# EAGLE board Child-panelized (EAGLE 7.4.0)
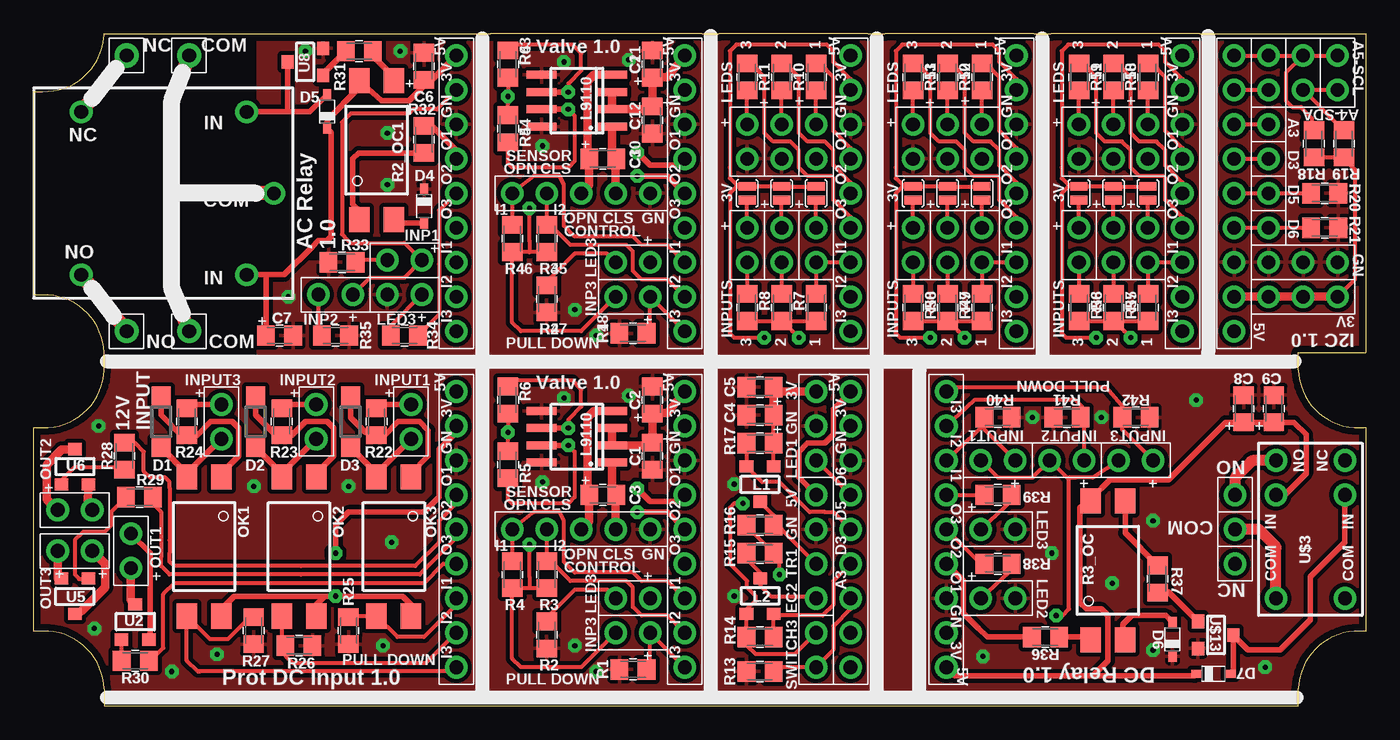
[diagram p0: board, top side]
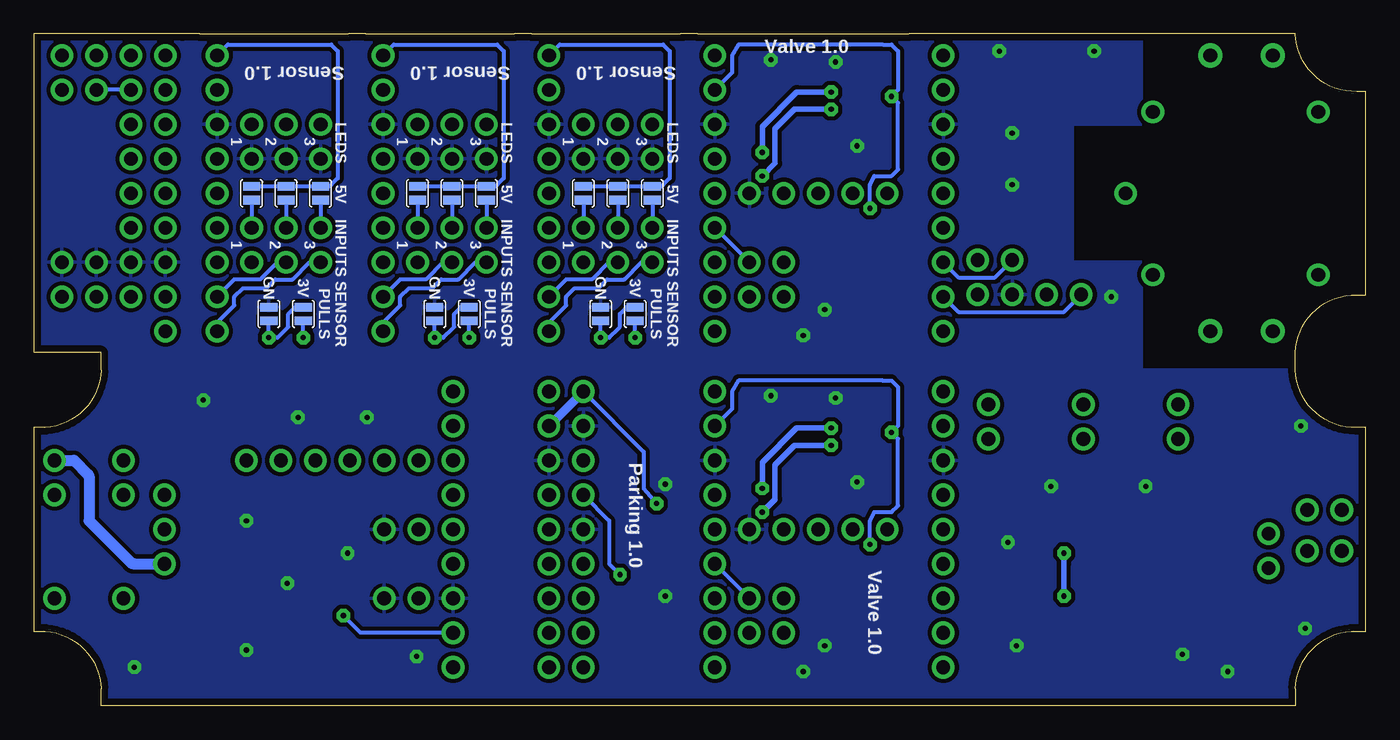
[diagram p1: board, bottom side, seen from below]

Size 98.11 x 49.53 mm. Coordinates in mm from the lower left corner, seen from the top.
Outline: 5.17,1.27 arc90 0.67,5.52 0,5.52 0,20.52 0.67,20.52 arc90 5.17,24.77 5.17,26.04 arc90 0.67,30.28 0,30.28 0,45.29 0.67,45.29 arc90 5.17,49.53 32.38,49.53 33.66,49.53 49.21,49.53 50.32,49.53 50.48,49.53 61.44,49.53 62.71,49.53 73.66,49.53 74.93,49.53 85.88,49.53 87.15,49.53 98.11,49.53 98.11,26.04 93.17,26.04 93.17,24.77 arc90 97.67,20.52 98.11,20.52 98.11,5.51 97.67,5.51 arc90 93.17,1.27 93.17,0 5.17,0 5.17,1.27
Copper layers (1*2*15*16): Top 0.035mm / dielectric 0.2mm / layer 2 0.035mm / dielectric 1.2mm / layer 15 0.035mm / dielectric 0.2mm / Bottom 0.035mm
Design rules "Elecrow_PCB_eagle_rule": minimum track width 6mil, minimum drill 12mil, track to track 6mil, track to pad 8mil, pad to pad 12mil, via to via 6mil, smd to smd 0mil, copper to edge 20mil, drill to drill 10mil, minimum pad ring 6mil, minimum via ring 6mil, stop-mask expansion 0mil, vias tented up to drill 100mil, thermal gap 10mil
tKeepout: area 15.2,35.2 to 20.3,40.3

## Footprints (pad centres in the part's own frame; a part is rotated, then mirrored left to right if it is on the bottom)
CAP_0805 = smd 1.3 x 1.5: 1 -1,0; 2 1,0
SOD123 = smd 1.4 x 1.4: A 1.9,0; C -1.9,0
SOD323 = smd 0.8 x 0.6: A 1.25,0; C -1.25,0
SOT23-3 = smd 1 x 0.9: 1 -1,-1.3; 2 1,-1.3; 3 0,1.3
SO-08 = smd 0.6 x 2.2: 1 -1.905,-2.6; 2 -0.635,-2.6; 3 0.635,-2.6; 4 1.905,-2.6; 5 1.905,2.6; 6 0.635,2.6; 7 -0.635,2.6; 8 -1.905,2.6
SO-4_PC817 = smd 1.85 x 1.5: 1 -5.125,1.27; 2 -5.125,-1.27; 3 5.125,-1.27; 4 5.125,1.27
DUPONT_2 = drill 1.016 pad 1.676: 1 -1.27,0; 2 1.27,0
DUPONT_4 = drill 1.016 pad 1.676: 1 -3.81,0; 2 -1.27,0; 3 1.27,0; 4 3.81,0
DUPONT_3 = drill 1.016 pad 1.676: 1 -2.54,0; 2 0,0; 3 2.54,0
R_0805 = smd 1.3 x 1.5: 1 -1,0; 2 1,0
RELAY_SRD-SL-C = drill 1.016 pad 1.676: 1 -6.15,6; 2 -6.15,-6; 3 -8.15,0; 4 6.05,6; 5 6.05,-6
PAD-JUMPER-2-NO_YES_SILK = smd 0.635 x 1.27: 1 -0.501,0; 2 0.501,0
DUPONT_FEM90_9 = drill 1.016 pad 1.676: 1 -10.16,0; 2 -7.62,0; 3 -5.08,0; 4 -2.54,0; 5 0,0; 6 2.54,0; 7 5.08,0; 8 7.62,0; 9 10.16,0
RELAY-G5V = drill 1.016 pad 1.676: 1 5.08,2.54; 2 2.54,2.54; 5 -5.08,2.54; 6 -5.08,-2.54; 9 2.54,-2.54; 10 5.08,-2.54
DUPONT_9 = drill 1.016 pad 1.676: 1 -10.16,0; 2 -7.62,0; 3 -5.08,0; 4 -2.54,0; 5 0,0; 6 2.54,0; 7 5.08,0; 8 7.62,0; 9 10.16,0
DUPONT_1_LRG = drill 1.016 pad 1.778: 1 0,0
DUPONT_1 = drill 1.016 pad 1.676: 1 0,0
DUPONT_5 = drill 1.016 pad 1.676: 1 -5.08,0; 2 -2.54,0; 3 0,0; 4 2.54,0; 5 5.08,0

## Placement (x,y rotation side)
C1  0.1uF  [CAP_0805]  45.56,18.41 270 top
C2  10uF  [CAP_0805]  45.56,22.54 90 top
C3  0.1uF  [CAP_0805]  41.91,15.56 0 top
C4  10uF  [CAP_0805]  53.5,21.43 180 top
C5  0.1uF  [CAP_0805]  53.5,23.5 180 top
C6  10uF  [CAP_0805]  28.73,47.15 90 top
C7  0.1uF  [CAP_0805]  18.1,27.3 0 top
C8  10uF  [CAP_0805]  89.12,21.91 90 top
C9  0.1uF  [CAP_0805]  91.35,21.91 90 top
C10  0.1uF  [CAP_0805]  41.91,40.32 0 top
C11  10uF  [CAP_0805]  45.56,47.31 90 top
C12  0.1uF  [CAP_0805]  45.56,43.18 270 top
D1  1N4148  [SOD123]  9.37,20.95 270 top
D2  1N4148  [SOD123]  16.35,20.95 270 top
D3  1N4148  [SOD123]  23.34,20.95 270 top
D4  [SOD323]  28.73,36.83 270 top
D5  [SOD323]  21.59,43.81 90 top
D6  [SOD323]  83.89,4.92 90 top
D7  [SOD323]  86.9,2.38 0 top
L1  [SOT23-3]  53.5,16.35 180 top
L2  [SOT23-3]  53.5,8.1 0 top
L3  L9110 Motor 1  [SO-08]  40.01,44.61 90 top
L9110  L9110 Motor 1  [SO-08]  40.01,19.84 90 top
OK1  [SO-4_PC817]  12.54,11.75 270 top
OK2  [SO-4_PC817]  19.53,11.75 270 top
OK3  [SO-4_PC817]  26.51,11.75 270 top
PINP1  [DUPONT_2]  13.81,20.95 90 top
PINP2  [DUPONT_2]  20.8,20.95 90 top
PINP3  [DUPONT_2]  27.78,20.95 90 top
PRK_DIST  [DUPONT_4]  57.63,11.75 270 top
PRK_LED  [DUPONT_3]  57.63,20.64 270 top
PSWITCH  [DUPONT_2]  57.63,4.13 90 top
R1  10K  [R_0805]  44.13,2.7 180 top
R2  1K  [R_0805]  37.78,5.24 270 top
R2_LED  [DUPONT_2]  27.3,30.32 180 top
R2_OC1  [SO-4_PC817]  25.24,40.96 90 top
R2_RELAY  RELAY_SRD_SL_C  [RELAY_SRD-SL-C]  9.53,37.78 180 top
R2_SW  [DUPONT_2]  22.23,30.32 0 top
R2_SW1  [DUPONT_2]  27.3,32.86 0 top
R3  10K  [R_0805]  37.78,9.68 90 top
R3_LED  [DUPONT_2]  71.03,7.94 0 top
R3_LED1  [DUPONT_2]  71.03,13.02 0 top
R3_OC  [SO-4_PC817]  79.12,10 90 top
R4  10K  [R_0805]  35.24,9.68 90 top
R5  10K  [R_0805]  34.92,17.78 270 top
R6  10K  [R_0805]  34.92,22.54 90 top
R7  10K  [R_0805]  57.63,29.37 270 top
R8  10K  [R_0805]  55.09,29.37 270 top
R9  10K  [R_0805]  52.55,29.37 270 top
R10  1K  [R_0805]  57.63,46.35 270 top
R11  1K  [R_0805]  55.09,46.35 270 top
R12  1K  [R_0805]  52.55,46.35 270 top
R13  10K  [R_0805]  53.5,2.54 180 top
R14  10K  [R_0805]  53.5,5.08 180 top
R15  10K  [R_0805]  53.5,11.27 0 top
R16  10K  [R_0805]  53.5,13.34 180 top
R17  10K  [R_0805]  53.5,19.37 0 top
R18  4K7  [R_0805]  94.3,41.43 90 top
R19  4K7  [R_0805]  96.52,41.43 90 top
R20  10K  [R_0805]  95.09,37.78 0 top
R21  10K  [R_0805]  95.09,35.24 0 top
R22  4.7K  [R_0805]  25.24,20.95 90 top
R23  4.7K  [R_0805]  18.26,20.95 90 top
R24  4.7K  [R_0805]  11.27,20.95 90 top
R25  10K  [R_0805]  23.18,5.56 90 top
R26  10K  [R_0805]  19.53,4.45 180 top
R27  10K  [R_0805]  16.19,5.56 90 top
R28  1K  [R_0805]  6.67,18.41 270 top
R29  1K  [R_0805]  7.78,15.4 180 top
R30  1K  [R_0805]  7.46,3.33 180 top
R31  1K  [R_0805]  23.97,48.26 180 top
R32  1K  [R_0805]  28.73,41.75 90 top
R33  10K  [R_0805]  22.7,32.7 180 top
R34  1K  [R_0805]  27.3,27.3 0 top
R35  10K  [R_0805]  22.23,27.3 0 top
R36  1K  [R_0805]  74.52,5.08 180 top
R37  1K  [R_0805]  82.78,9.37 270 top
R38  1K  [R_0805]  71.03,10.48 180 top
R39  1K  [R_0805]  71.03,15.56 180 top
R40  10K  [R_0805]  71.03,21.27 0 top
R41  10K  [R_0805]  76.11,21.27 180 top
R42  10K  [R_0805]  81.19,21.27 0 top
R43  10K  [R_0805]  34.92,47.31 90 top
R44  10K  [R_0805]  34.92,42.55 270 top
R45  10K  [R_0805]  37.78,34.45 90 top
R46  10K  [R_0805]  35.24,34.45 90 top
R47  1K  [R_0805]  37.78,30 270 top
R48  10K  [R_0805]  44.13,27.46 180 top
R49  10K  [R_0805]  69.85,29.37 270 top
R50  10K  [R_0805]  67.31,29.37 270 top
R51  10K  [R_0805]  64.77,29.37 270 top
R52  1K  [R_0805]  69.85,46.35 270 top
R53  1K  [R_0805]  67.31,46.35 270 top
R54  1K  [R_0805]  64.77,46.35 270 top
R55  10K  [R_0805]  82.07,29.37 270 top
R56  10K  [R_0805]  79.53,29.37 270 top
R57  10K  [R_0805]  76.99,29.37 270 top
R58  1K  [R_0805]  82.07,46.35 270 top
R59  1K  [R_0805]  79.53,46.35 270 top
R60  1K  [R_0805]  76.99,46.35 270 top
RELAY4  [DUPONT_2]  7.14,11.43 90 top
RELAY5  [DUPONT_2]  3.02,11.43 180 top
RELAY6  [DUPONT_2]  3.02,14.45 0 top
RINP4  [DUPONT_2]  71.03,18.1 180 top
RINP5  [DUPONT_2]  76.11,18.1 180 top
RINP6  [DUPONT_2]  81.19,18.1 180 top
SENLED1  [DUPONT_2]  57.63,41.59 270 top
SENLED2  [DUPONT_2]  55.09,41.59 270 top
SENLED3  [DUPONT_2]  52.55,41.59 270 top
SENLED4  [DUPONT_2]  69.85,41.59 270 top
SENLED5  [DUPONT_2]  67.31,41.59 270 top
SENLED6  [DUPONT_2]  64.77,41.59 270 top
SENLED7  [DUPONT_2]  82.07,41.59 270 top
SENLED8  [DUPONT_2]  79.53,41.59 270 top
SENLED9  [DUPONT_2]  76.99,41.59 270 top
SENSOR1  [DUPONT_2]  57.63,33.97 90 top
SENSOR2  [DUPONT_2]  55.09,33.97 90 top
SENSOR3  [DUPONT_2]  52.55,33.97 90 top
SENSOR4  [DUPONT_2]  96.04,46.67 90 top
SENSOR5  [DUPONT_2]  44.13,5.4 180 top
SENSOR6  [DUPONT_2]  44.13,30.16 180 top
SENSOR7  [DUPONT_2]  90.96,46.67 90 top
SENSOR8  [DUPONT_2]  93.5,46.67 90 top
SENSOR9  [DUPONT_2]  69.85,33.97 90 top
SENSOR10  [DUPONT_2]  67.31,33.97 90 top
SENSOR11  [DUPONT_2]  64.77,33.97 90 top
SENSOR12  [DUPONT_2]  82.07,33.97 90 top
SENSOR13  [DUPONT_2]  79.53,33.97 90 top
SENSOR14  [DUPONT_2]  76.99,33.97 90 top
SJ1  [PAD-JUMPER-2-NO_YES_SILK]  57.63,37.78 90 top
SJ2  [PAD-JUMPER-2-NO_YES_SILK]  57.63,37.78 90 bottom
SJ3  [PAD-JUMPER-2-NO_YES_SILK]  55.09,37.78 90 top
SJ4  [PAD-JUMPER-2-NO_YES_SILK]  55.09,37.78 90 bottom
SJ5  [PAD-JUMPER-2-NO_YES_SILK]  52.55,37.78 90 top
SJ6  [PAD-JUMPER-2-NO_YES_SILK]  52.55,37.78 90 bottom
SJ7  [PAD-JUMPER-2-NO_YES_SILK]  53.82,28.89 270 bottom
SJ8  [PAD-JUMPER-2-NO_YES_SILK]  56.36,28.89 90 bottom
SJ9  [PAD-JUMPER-2-NO_YES_SILK]  69.85,37.78 90 top
SJ10  [PAD-JUMPER-2-NO_YES_SILK]  69.85,37.78 90 bottom
SJ11  [PAD-JUMPER-2-NO_YES_SILK]  67.31,37.78 90 top
SJ12  [PAD-JUMPER-2-NO_YES_SILK]  67.31,37.78 90 bottom
SJ13  [PAD-JUMPER-2-NO_YES_SILK]  64.77,37.78 90 top
SJ14  [PAD-JUMPER-2-NO_YES_SILK]  64.77,37.78 90 bottom
SJ15  [PAD-JUMPER-2-NO_YES_SILK]  66.04,28.89 270 bottom
SJ16  [PAD-JUMPER-2-NO_YES_SILK]  68.58,28.89 90 bottom
SJ17  [PAD-JUMPER-2-NO_YES_SILK]  82.07,37.78 90 top
SJ18  [PAD-JUMPER-2-NO_YES_SILK]  82.07,37.78 90 bottom
SJ19  [PAD-JUMPER-2-NO_YES_SILK]  79.53,37.78 90 top
SJ20  [PAD-JUMPER-2-NO_YES_SILK]  79.53,37.78 90 bottom
SJ21  [PAD-JUMPER-2-NO_YES_SILK]  76.99,37.78 90 top
SJ22  [PAD-JUMPER-2-NO_YES_SILK]  76.99,37.78 90 bottom
SJ23  [PAD-JUMPER-2-NO_YES_SILK]  78.26,28.89 270 bottom
SJ24  [PAD-JUMPER-2-NO_YES_SILK]  80.8,28.89 90 bottom
U2  [SOT23-3]  7.46,6.19 0 top
U5  [SOT23-3]  3.02,8.1 180 top
U6  [SOT23-3]  3.02,17.62 0 top
U$1  [DUPONT_FEM90_9]  31.11,13.02 90 top
U$2  [DUPONT_FEM90_9]  47.94,13.02 90 top
U$3  RELAY_G5V1  [RELAY-G5V]  94.05,13.02 90 top
U$4  [DUPONT_9]  60.17,13.02 90 top
U$5  [DUPONT_FEM90_9]  47.94,37.78 90 top
U$6  [DUPONT_FEM90_9]  60.17,37.78 90 top
U$7  [DUPONT_FEM90_9]  31.11,37.78 90 top
U$8  [SOT23-3]  20,47.47 90 top
U$9  [DUPONT_1_LRG]  6.83,27.62 270 top
U$10  [DUPONT_1_LRG]  11.43,27.62 270 top
U$11  [DUPONT_1_LRG]  6.83,47.94 270 top
U$12  [DUPONT_1_LRG]  11.43,47.94 270 top
U$13  [SOT23-3]  87.06,5.24 270 top
U$14  [DUPONT_FEM90_9]  67.22,13.02 270 top
U$15  [DUPONT_1]  88.49,10.48 90 top
U$16  [DUPONT_1]  88.49,13.02 90 top
U$17  [DUPONT_1]  88.49,15.56 90 top
U$18  [DUPONT_FEM90_9]  88.42,37.78 270 top
U$19  [DUPONT_1]  90.96,42.86 270 top
U$20  [DUPONT_1]  90.96,35.24 270 top
U$21  [DUPONT_1]  90.96,37.78 270 top
U$22  [DUPONT_1]  90.96,40.32 270 top
U$23  [DUPONT_3]  93.5,32.7 0 top
U$24  [DUPONT_3]  93.5,30.16 0 top
U$25  [DUPONT_FEM90_9]  72.39,37.78 90 top
U$26  [DUPONT_FEM90_9]  84.61,37.78 90 top
VALVE  [DUPONT_5]  40.32,13.02 180 top
VALVE1  [DUPONT_5]  40.32,37.78 180 top
VLV_LED  [DUPONT_2]  44.13,7.94 180 top
VLV_LED1  [DUPONT_2]  44.13,32.7 180 top

## Library data of the parts
C1-C12 D4-D7 L1-L3 L9110 OK1-OK3 PINP1-PINP3 PRK_DIST PRK_LED PSWITCH R1 R2 R2_LED R2_OC1 R2_RELAY R2_SW R2_SW1 R3 R3_LED R3_LED1 R3_OC R4-R60 RELAY4-RELAY6 RINP4-RINP6 SENLED1-SENLED9 SENSOR1-SENSOR14 SJ1-SJ24 U2 U5 U6 U$1-U$26 VALVE VALVE1 VLV_LED VLV_LED1 = TD22057
D1-D3 = diodes; MPN: 1N4148W; OC_FARNELL: 1651821; PACKAGE: SOD123; SUPPLIER: MULTICOMP

## Nets
I2C_+3V3: R18.1 R19.1 U$18.8 U$24.1 U$24.2 U$24.3
I2C_A3: U$18.3 U$19.1
I2C_D3: U$18.4 U$22.1
I2C_D5: R20.1 U$18.5 U$21.1
I2C_D6: R21.1 U$18.6 U$20.1
I2C_GND: R20.2 R21.2 U$18.7 U$23.1 U$23.2 U$23.3
I2C_SCL: R18.2 SENSOR4.2 SENSOR7.2 SENSOR8.2 U$18.1
I2C_SDA: R19.2 SENSOR4.1 SENSOR7.1 SENSOR8.1 U$18.2
N$1: C10.1 L3.4 VALVE1.3
N$2: C10.2 L3.1 VALVE1.2
N$3: C3.1 L9110.4 VALVE.3
N$4: C3.2 L9110.1 VALVE.2
N$5: R2.1 VLV_LED.2
N$6: D1.C OK1.1 R24.1
N$7: D1.A OK1.2 PINP1.1
N$8: PINP1.2 R24.2
N$9: D2.C OK2.1 R23.1
N$10: D2.A OK2.2 PINP2.1
N$11: PINP2.2 R23.2
N$12: R47.1 VLV_LED1.2
N$13: D3.C OK3.1 R22.1
N$14: D3.A OK3.2 PINP3.1
N$15: PINP3.2 R22.2
N$16: R10.2 SENLED1.1
N$17: R11.2 SENLED2.1
N$18: R12.2 SENLED3.1
N$19: R30.2 U2.1
N$20: R52.2 SENLED4.1
N$21: RELAY4.1 U2.3
N$22: RELAY4.2 U2.2
N$23: R53.2 SENLED5.1
N$24: R54.2 SENLED6.1
N$25: SENSOR11.2 SJ13.1 SJ14.1
N$26: SENSOR3.2 SJ5.1 SJ6.1
N$27: SENSOR2.2 SJ3.1 SJ4.1
N$28: R29.2 U5.1
N$29: R28.2 U6.1
N$30: R3_LED1.1 R39.1
N$31: RELAY5.1 U5.3
N$32: RELAY5.2 U5.2
N$33: RELAY6.1 U6.3
N$34: RELAY6.2 U6.2
N$35: R2_LED.1 R34.1
N$36: D5.A R2_RELAY.2 U$8.3
N$37: R31.2 U$8.1
N$38: R2_OC1.3 R31.1
N$39: D4.A R2_OC1.2
N$40: R2_OC1.1 R32.1
N$41: D7.A U$3.9 U$13.3
N$42: R37.2 U$13.1
N$43: R3_OC.3 R37.1
N$44: D6.A R3_OC.2
N$45: R3_OC.1 R36.1
N$46: R3_LED.1 R38.1
N$47: U$3.5 U$16.1
N$48: SENSOR1.2 SJ1.1 SJ2.1
N$49: SENSOR10.2 SJ11.1 SJ12.1
N$50: SENSOR9.2 SJ9.1 SJ10.1
N$51: R58.2 SENLED7.1
N$52: R59.2 SENLED8.1
N$53: R60.2 SENLED9.1
N$54: SENSOR14.2 SJ21.1 SJ22.1
N$55: SENSOR13.2 SJ19.1 SJ20.1
N$56: SENSOR12.2 SJ17.1 SJ18.1
PARK_+3V3: C4.1 C5.1 L1.1 L2.1 PRK_LED.1 PSWITCH.2 R14.2 R17.2 U$4.8
PARK_+5V: PRK_DIST.1 R15.2 R16.2 U$4.9
PARK_ECHO: L2.2 R14.1 U$4.4
PARK_ECHO_5V: L2.3 PRK_DIST.4 R15.1
PARK_GND: C4.2 C5.2 PRK_DIST.2 PRK_LED.2 R13.2 U$4.7
PARK_RING: PRK_LED.3 U$4.6
PARK_SWITCH: PSWITCH.1 R13.1 U$4.3
PARK_TRIGGER: L1.2 R17.1 U$4.5
PARK_TRIGGER_5V: L1.3 PRK_DIST.3 R16.1
PROT_+3V3: OK1.4 OK2.4 OK3.4 U$1.8
PROT_GND: R25.1 R26.1 R27.1 U$1.7
PROT_INPUT1: OK1.3 R27.2 U$1.1
PROT_INPUT2: OK2.3 R26.2 U$1.2
PROT_INPUT3: OK3.3 R25.2 U$1.3
PROT_RELAY1: R30.1 U$1.4
PROT_RELAY2: R29.1 U$1.5
PROT_RELAY3: R28.1 U$1.6
R2_COM: R2_RELAY.3 U$10.1 U$12.1
R2_NC: R2_RELAY.5 U$11.1
R2_NC1: U$3.1 U$17.1
R2_NO: R2_RELAY.4 U$9.1
R2_NO1: U$3.10 U$15.1
REL_AC_+3V3: R2_SW1.2 R2_SW.2 U$7.8
REL_AC_+5V: C6.1 C7.1 D5.C R2_OC1.4 R2_RELAY.1 U$7.9
REL_AC_GND: C6.2 C7.2 D4.C R2_LED.2 R33.2 R35.2 U$7.7 U$8.2
REL_AC_INP1: R2_SW1.1 R33.1 U$7.3
REL_AC_INP2: R2_SW.1 R35.1 U$7.2
REL_AC_LED2: R34.2 U$7.5
REL_AC_RELAY: R32.2 U$7.6
REL_DC_+3V3: RINP4.2 RINP5.2 RINP6.2 U$14.8
REL_DC_+5V: C8.1 C9.1 D7.C R3_OC.4 U$3.2 U$14.9
REL_DC_CTRL1: R36.2 U$14.6
REL_DC_GND: C8.2 C9.2 D6.C R3_LED1.2 R3_LED.2 R40.2 R41.2 R42.2 U$13.2 U$14.7
REL_DC_INP1: R40.1 RINP4.1 U$14.3
REL_DC_INP2: R41.1 RINP5.1 U$14.2
REL_DC_INP3: R42.1 RINP6.1 U$14.1
REL_DC_LED2: R38.2 U$14.5
REL_DC_LED3: R39.2 U$14.4
SENSOR_1: R7.1 SENSOR1.1 U$6.3
SENSOR_2: R8.1 SENSOR2.1 U$6.2
SENSOR_3: R9.1 SENSOR3.1 U$6.1
SENSOR_4: R49.1 SENSOR9.1 U$25.3
SENSOR_5: R50.1 SENSOR10.1 U$25.2
SENSOR_6: R51.1 SENSOR11.1 U$25.1
SENSOR_7: R55.1 SENSOR12.1 U$26.3
SENSOR_8: R56.1 SENSOR13.1 U$26.2
SENSOR_9: R57.1 SENSOR14.1 U$26.1
SENSOR_+3V1: SJ9.2 SJ11.2 SJ13.2 SJ15.2 U$25.8
SENSOR_+3V2: SJ17.2 SJ19.2 SJ21.2 SJ23.2 U$26.8
SENSOR_+3V3: SJ1.2 SJ3.2 SJ5.2 SJ7.2 U$6.8
SENSOR_+5V: SJ2.2 SJ4.2 SJ6.2 U$6.9
SENSOR_+5V1: SJ10.2 SJ12.2 SJ14.2 U$25.9
SENSOR_+5V2: SJ18.2 SJ20.2 SJ22.2 U$26.9
SENSOR_GND: SENLED1.2 SENLED2.2 SENLED3.2 SJ8.2 U$6.7
SENSOR_GND1: SENLED4.2 SENLED5.2 SENLED6.2 SJ16.2 U$25.7
SENSOR_GND2: SENLED7.2 SENLED8.2 SENLED9.2 SJ24.2 U$26.7
SENSOR_LED1: R10.1 U$6.6
SENSOR_LED2: R11.1 U$6.5
SENSOR_LED3: R12.1 U$6.4
SENSOR_LED4: R53.1 U$25.5
SENSOR_LED5: R52.1 U$25.6
SENSOR_LED6: R54.1 U$25.4
SENSOR_LED7: R59.1 U$26.5
SENSOR_LED8: R58.1 U$26.6
SENSOR_LED9: R60.1 U$26.4
SENSOR_PULL: R7.2 R8.2 R9.2 SJ7.1 SJ8.1
SENSOR_PULL1: R49.2 R50.2 R51.2 SJ15.1 SJ16.1
SENSOR_PULL2: R55.2 R56.2 R57.2 SJ23.1 SJ24.1
VALVE_+3V1: R43.1 R44.1 R45.1 R46.1 SENSOR6.2 U$5.8
VALVE_+3V3: R3.1 R4.1 R5.1 R6.1 SENSOR5.2 U$2.8
VALVE_+5V: C1.1 C2.1 L9110.2 L9110.3 U$2.9
VALVE_+5V1: C11.1 C12.1 L3.2 L3.3 U$5.9
VALVE_CLOSED: R3.2 U$2.2 VALVE.4
VALVE_CLOSED1: R45.2 U$5.2 VALVE1.4
VALVE_CONTROL1: L9110.6 R6.2 U$2.6
VALVE_CONTROL2: L9110.7 R5.2 U$2.5
VALVE_CONTROL3: L3.6 R43.2 U$5.6
VALVE_CONTROL4: L3.7 R44.2 U$5.5
VALVE_GND: C1.2 C2.2 L9110.5 L9110.8 R1.2 R2.2 U$2.7 VALVE.1
VALVE_GND1: C11.2 C12.2 L3.5 L3.8 R47.2 R48.2 U$5.7 VALVE1.1
VALVE_LED: U$2.4 VLV_LED.1
VALVE_LED1: U$5.4 VLV_LED1.1
VALVE_OPENED: R4.2 U$2.3 VALVE.5
VALVE_OPENED1: R46.2 U$5.3 VALVE1.5
VALVE_SENSOR1: R48.1 SENSOR6.1 U$5.1
VALVE_SENSOR3: R1.1 SENSOR5.1 U$2.1

## Tracks (layer width: path | path; a pad name or v marks a point on that pad's centre or on a via)
I2C_+3V3
  Top 0.305: R18.1 R19.1 96.52,40.32 97.31,39.53 97.31,31.43 U$24.3
  Top 0.61: U$18.8 U$24.1 U$24.2 U$24.3
I2C_A3
  Top 0.305: U$18.3 U$19.1
I2C_D3
  Top 0.305: U$18.4 U$22.1
I2C_D5
  Top 0.305: U$18.5 U$21.1 R20.1
I2C_D6
  Top 0.305: U$18.6 U$20.1 R21.1
I2C_GND
  pour Top (isolate 0.305): 85.88,26.04 98.11,26.04 98.11,49.53 85.88,49.53
  pour Bottom (isolate 0.279): 85.88,26.04 98.11,26.04 98.11,49.53 85.88,49.53
I2C_SCL
  Top 0.305: SENSOR8.2 SENSOR4.2 | SENSOR8.2 SENSOR7.2 U$18.1 | 94.41,41.96 R18.2 94.14,42.59 94.14,43.34 93.34,44.13 92.71,44.13 92.23,44.61 92.23,46.67 SENSOR8.2
I2C_SDA
  Top 0.305: U$18.2 SENSOR7.1 | SENSOR4.1 SENSOR8.1 96,42.91 96.04,42.91 R19.2
  Bottom 0.305: SENSOR7.1 SENSOR8.1
N$1
  Top 0.61: L3.4 41.27,46.51 40.8,46.04 40.8,42.23 40.8,42.07 40.8,40.43 C10.1 40.91,38.37 VALVE1.3
N$2
  Top 0.305: 42.55,42.64 L3.1 | L3.1 42.7,42.6 L3.1
  Top 0.61: L3.1 42.6,40.63 C10.2 42.86,40.27 42.86,39.21 VALVE1.2
N$3
  Top 0.61: L9110.4 41.27,21.75 40.8,21.27 40.8,17.46 40.8,17.3 40.8,15.67 C3.1 40.91,13.61 VALVE.3
N$4
  Top 0.305: 42.55,17.88 L9110.1 | L9110.1 42.7,17.84 L9110.1
  Top 0.61: L9110.1 42.6,15.86 C3.2 42.86,15.51 42.86,14.45 VALVE.2
N$5
  Top 0.305: VLV_LED.2 42.23,8.57 39.85,8.57 38.42,7.14 37.78,6.51 R2.1
N$6
  Top 0.406: D1.C 9.37,21.43 10.84,19.95 R24.1 12.02,19.95 13.02,20.95 14.61,20.95 15.08,20.48 15.08,18.41 13.81,17.14 OK1.1
N$7
  Top 0.406: PINP1.1 11.27,17.14 OK1.2 11.27,17.15 D1.A
N$8
  Top 0.406: PINP1.2 11.54,22.23 R24.2
N$9
  Top 0.406: D2.C 16.35,21.43 17.62,20.16 18.05,20.16 R23.1 19,19.95 20,20.95 21.59,20.95 22.07,20.48 22.07,18.41 20.8,17.14 OK2.1
N$10
  Top 0.406: PINP2.1 18.26,17.14 OK2.2 18.26,17.15 D2.A
N$11
  Top 0.406: PINP2.2 18.53,22.23 R23.2
N$12
  Top 0.305: VLV_LED1.2 42.23,33.34 39.85,33.34 38.42,31.91 37.78,31.27 R47.1
N$13
  Top 0.406: D3.C 23.34,21.27 24.45,20.16 25.04,20.16 R22.1 25.83,19.95 26.83,20.95 28.42,20.95 29.05,20.32 29.05,18.41 27.78,17.14 OK3.1
N$14
  Top 0.406: PINP3.1 25.24,17.14 OK3.2 25.24,17.15 D3.A
N$15
  Top 0.406: PINP3.2 25.51,22.23 R22.2
N$16
  Top 0.305: SENLED1.1 R10.2
N$17
  Top 0.305: SENLED2.1 R11.2
N$18
  Top 0.305: SENLED3.1 R12.2
N$19
  Top 0.305: R30.2 U2.1
N$20
  Top 0.305: SENLED4.1 R52.2
N$21
  Top 0.61: RELAY4.1 7.14,7.81 U2.3
N$22
  Top 0.406: 8.57,5 8.57,11.11 8.57,11.27 RELAY4.2
  Top 0.61: 8.57,5 U2.2
N$23
  Top 0.305: SENLED5.1 R53.2
N$24
  Top 0.305: SENLED6.1 R54.2
N$25
  Top 0.305: SENSOR11.2 SJ14.1
  Bottom 0.305: SJ14.1 SENSOR11.2
N$26
  Top 0.305: SENSOR3.2 SJ6.1
  Bottom 0.305: SJ6.1 SENSOR3.2
N$27
  Top 0.305: SENSOR2.2 SJ4.1
  Bottom 0.305: SJ4.1 SENSOR2.2
N$28
  Top 0.305: U5.1 3.99,9.37 3.33,9.37 3.02,9.68 3.02,12.22 3.49,12.7 3.65,12.86 5.24,12.86 5.71,13.34 5.71,14.34 R29.2
N$29
  Top 0.305: U6.1 2.02,16.62 3.02,17.62 6.46,17.62 R28.2
N$30
  Top 0.305: R3_LED1.1 72.19,15.29 R39.1
N$31
  Top 0.61: RELAY5.1 5.24,10.48 5.24,8.73 3.97,7.46 3.49,6.99 U5.3
N$32
  Top 0.61: RELAY5.2 1.75,9.42 U5.2
N$33
  Top 0.61: U6.3 2.99,18.89 2.06,18.89 0.95,17.78 0.95,17.46 0.95,15.56 0.95,15.24 RELAY6.1
N$34
  Top 0.61: U6.2 3.97,14.77 RELAY6.2
N$35
  Top 0.305: R2_LED.1 26.3,28.05 R34.1
N$36
  Top 0.406: 18.57,43.78 19.53,43.78 20.31,43.78 D5.A | 18.57,43.78 R2_RELAY.2 | U$8.3 18.7,43.91 18.57,43.78
N$37
  Top 0.406: U$8.1 21.3,46.59 R31.2
N$38
  Top 0.406: 26.4,46.35 R2_OC1.3 26.51,46.35 26.19,46.67 24.97,47.9 R31.1
N$39
  Top 0.406: D4.A 26.76,35.58 R2_OC1.2
N$40
  Top 0.406: R2_OC1.1 24.13,36.35 23.5,36.99 23.5,40.32 23.92,40.75 R32.1 28.69,40.96
N$41
  Top 0.406: U$3.9 96.59,12.06 94.05,9.53 94.05,6.35 91.82,4.13 89.44,4.13 88.36,5.21 U$13.3 88.36,2.59 D7.A
N$42
  Top 0.406: R37.2 82.5,8.41 83.59,8.41 U$13.1
N$43
  Top 0.406: R3_OC.3 80.39,12.75 R37.1
N$44
  Top 0.406: D6.A 83.39,6.67 81.19,6.67 80.87,6.67 80.23,6.03 80.23,5.35 R3_OC.2
N$45
  Top 0.406: R36.1 77.11,5.08 R3_OC.1
N$46
  Top 0.305: R3_LED.1 71.87,9.89 R38.1
N$47
  Top 0.813: U$3.5 91.51,11.62 arc45 91.41,11.84 90.24,13.02 U$16.1
N$48
  Top 0.305: SENSOR1.2 SJ2.1
  Bottom 0.305: SJ2.1 SENSOR1.2
N$49
  Top 0.305: SENSOR10.2 SJ12.1
  Bottom 0.305: SJ12.1 SENSOR10.2
N$50
  Top 0.305: SENSOR9.2 SJ10.1
  Bottom 0.305: SJ10.1 SENSOR9.2
N$51
  Top 0.305: SENLED7.1 R58.2
N$52
  Top 0.305: SENLED8.1 R59.2
N$53
  Top 0.305: SENLED9.1 R60.2
N$54
  Top 0.305: SENSOR14.2 SJ22.1
  Bottom 0.305: SJ22.1 SENSOR14.2
N$55
  Top 0.305: SENSOR13.2 SJ20.1
  Bottom 0.305: SJ20.1 SENSOR13.2
N$56
  Top 0.305: SENSOR12.2 SJ18.1
  Bottom 0.305: SJ18.1 SENSOR12.2
PARK_+3V3  (via drill 0.38 pad 0.99)
  Top 0.305: C4.1 R17.2 L1.1 | PSWITCH.2 56.04,3.81 53.98,3.81 53.18,3.81 52.55,4.45 52.55,5.03 R14.2 L2.1 52.55,6.84 52.55,7.14 53.18,7.78 53.18,8.1 52.55,8.73 52.55,9.21 51.28,10.48 51.28,13.65 51.28,14.13 51.28,14.61 51.59,14.92 v52.23,14.92
  Top 0.61: PRK_LED.1 54.66,23.18 C5.1 C4.1
  Bottom 0.305: PRK_LED.1 53.18,18.73 53.18,16.19 53.18,16.03 v52.23,14.92
  Bottom 0.61: U$4.8 PRK_LED.1
PARK_+5V  (via drill 0.38 pad 0.99)
  Top 0.305: v54.93,9.68 54.93,10.84 R15.2 52.5,13.27 R16.2
  Top 0.406: U$4.9 58.9,21.91 58.9,20.64 58.9,20 58.26,19.37 56.99,19.37 56.36,18.73 56.36,16.83 PRK_DIST.1
  Bottom 0.305: PRK_DIST.1 55.72,13.65 55.72,10.48 v54.93,9.68
PARK_ECHO
  Top 0.305: R14.1 L2.2 54.63,6.67 58.1,6.67 58.9,7.46 58.9,9.21 U$4.4
PARK_ECHO_5V
  Top 0.305: PRK_DIST.4 57.47,8.1 54.29,8.1 53.53,8.86 53.53,8.89 L2.3 53.5,9.84 52.7,10.64 52.7,11.06 R15.1
PARK_GND  (via drill 0.38 pad 0.99)
  other vias: 51.59,16.35 51.59,8.1
  pour Top (isolate 0.305): 65.88,24.77 50.48,24.77 50.48,0 65.88,0
  pour Bottom (isolate 0.305): 65.88,24.77 50.48,24.77 50.48,0 65.88,0
PARK_RING
  Top 0.305: PRK_LED.3 58.9,16.83 U$4.6
PARK_SWITCH
  Top 0.305: R13.1 54.82,2.86 PSWITCH.1 58.9,4.13 58.9,5.87 60.17,7.14 U$4.3
PARK_TRIGGER
  Top 0.305: U$4.5 58.9,14.29 58.26,14.29 57.15,14.29 55.56,15.88 54.93,16.51 53.64,16.51 L1.2 R17.1
PARK_TRIGGER_5V
  Top 0.305: L1.3 54.5,14.05 R16.1 54.82,13.02 55.09,13.02 PRK_DIST.3
PROT_+3V3  (via drill 0.38 pad 0.99)
  Top 0.406: 21.43,8.1 15.88,8.1 14.76,8.1 13.97,7.3 13.97,6.78 OK1.4 | 21.43,8.1 v22.23,8.1 27.15,8.1 27.78,7.46 OK3.4 | U$1.8 31.11,20.16 29.84,18.89 29.84,15.4 28.73,14.29 23.18,14.29 22.23,13.34 v22.23,11.27 | OK2.4 20.8,7.46 21.43,8.1
  Bottom 0.406: v22.23,8.1 22.23,10.48 v22.23,11.27
PROT_GND  (via drill 0.38 pad 0.99)
  other vias: 25.72,4.45 10.16,2.54 13.49,3.81 23.18,16.19 4.45,5.71 16.19,16.19 4.76,20.64 26.35,12.06
  pour Top (isolate 0.305): 33.66,0 33.66,24.77 5.08,24.77 arc-90 0.95,20.48 0,20.48 0,5.56 0.79,5.56 arc-90 5.08,0
  pour Bottom (isolate 0.305): 33.66,0 33.66,24.77 5.08,24.77 arc-90 0.95,20.48 0,20.48 0,5.56 0.79,5.56 arc-90 5.08,0
PROT_INPUT1
  Top 0.305: U$1.1 30.64,2.54 12.22,2.54 12.06,2.54 11.27,3.33 11.27,5.87 11.65,6.25 | R27.2 16.19,6.83 14.29,4.92 12.97,4.92 11.65,6.25 | 11.65,6.25 OK1.3
PROT_INPUT2
  Top 0.305: OK2.3 18.26,4.4 R26.2 18.53,3.7 19.05,3.17 28.89,3.17 U$1.2
PROT_INPUT3
  Top 0.305: U$1.3 31.11,7.46 28.73,5.08 26.78,5.08 OK3.3 23.43,6.62 R25.2
PROT_RELAY1
  Top 0.305: R30.1 8.62,3.49 8.73,3.49 9.53,4.29 9.53,8.26 10.32,9.05 19.84,9.05 28.73,9.05 30.16,10.48 U$1.4
PROT_RELAY2
  Top 0.305: R29.1 8.78,14.88 9.37,14.29 9.37,10.95 9.37,10.32 10,9.68 19.68,9.68 28.42,9.68 31.11,12.38 U$1.5
PROT_RELAY3
  Top 0.305: U$1.6 31.11,14.92 29.84,13.65 29.84,12.06 28.1,10.32 19.68,10.32 10.32,10.32 10,10.64 10,11.27 10,12.22 10,16.08 10,16.51 9.68,16.83 8.57,16.83 8.1,17.3 8.1,18.73 7.46,19.37 6.71,19.37 R28.1
R2_COM
  Top 1.016: R2_RELAY.3 10.79,37.78 10.16,37.78 | U$12.1 10.16,44.77 10.16,37.78 | U$10.1 10.16,30.8 10.16,37.78
R2_NC
  Top 1.016: U$11.1 R2_RELAY.5
R2_NC1
  Top 0.813: U$3.1 89.89,18.1 arc45 89.67,18 89.12,17.46 88.58,16.92 arc45 88.49,16.7 U$17.1
R2_NO
  Top 1.016: R2_RELAY.4 U$9.1
R2_NO1
  Bottom 0.813: U$3.10 95.16,18.1 94.14,17.08 arc45 94.05,16.86 94.05,13.65 90.96,10.57 arc-45 90.74,10.48 U$15.1
REL_AC_+3V3
  Top 0.305: R2_SW.2 24.77,31.59 27.3,31.59 R2_SW1.2 27.3,34.13 23.34,34.13 22.86,34.61 22.7,34.77 22.7,43.02 23.34,43.66 27.62,43.66 27.94,43.97 29.69,43.97 U$7.8
REL_AC_+5V
  Top 0.406: R2_RELAY.1 17.14,31.78 | 17.14,31.78 18.26,31.78 18.45,31.78 20.48,33.81 20.95,34.29 21.59,34.29 21.91,34.61 21.91,42.25 D5.C 21.59,43.18 23.97,45.56 R2_OC1.4 25.6,44.61 27.62,44.61 28.73,45.72 C6.1 29.32,46.15 U$7.9 | C7.1 17.1,31.73 17.14,31.78
REL_AC_GND  (via drill 0.38 pad 0.99)
  other vias: 20,48.26 26.99,48.26 26.04,38.42 26.04,42.23 18.73,30.16
  pour Top (isolate 0.305): 32.38,49.53 32.38,24.77 16.51,24.77 16.51,32.7 21.59,32.7 21.59,42.86 16.51,42.86 16.51,49.53
  pour Bottom (isolate 0.305): 32.38,49.53 32.38,24.77 16.51,24.77 16.51,32.7 21.59,32.7 21.59,42.86 16.51,42.86 16.51,49.53
REL_AC_INP1
  Top 0.305: R2_SW1.1 23.86,32.86 R33.1
  Bottom 0.305: U$7.3 30,31.59 27.3,31.59 R2_SW1.1
REL_AC_INP2
  Top 0.305: R2_SW.1 20.95,27.42 R35.1
  Bottom 0.305: U$7.2 30,29.05 22.23,29.05 R2_SW.1
REL_AC_LED2
  Top 0.305: U$7.5 29.84,36.51 29.84,32.54 29.84,29.05 29.84,28.84 R34.2
  Top 0.406: 28.26,27.19 R34.2
REL_AC_RELAY
  Top 0.406: U$7.6 31.11,40.96 29.37,42.7 28.78,42.7 R32.2
REL_DC_+3V3  (via drill 0.38 pad 0.99)
  Top 0.305: RINP4.2 71.03,16.83 72.14,16.83 73.57,16.83 RINP5.2 75.87,17.07 | 75.95,16.99 75.87,17.07 | RINP6.2 78.01,16.83 76.74,16.83 | v75.31,6.67 75.79,6.67 76.27,7.14 76.27,16.83 | 76.74,16.83 76.27,16.83 | 75.87,17.07 76.11,16.83 76.27,16.83 | 76.27,16.83 76.74,16.83
  Bottom 0.305: U$14.8 74.04,5.4 v75.31,6.67
REL_DC_+5V
  Top 0.406: 78.01,2.22 81.03,2.22 85.49,2.22 D7.C | R3_OC.4 77.06,14.65 77.06,7.62 77.54,7.14 78.65,7.14 79.12,6.67 79.12,3.33 78.65,2.86 78.01,2.22 | R3_OC.4 77.85,15.72 | U$3.2 92.14,15.56 93.73,17.14 93.73,19.68 93.73,20 92.82,20.91 C9.1 | 91.87,20.95 C9.1 | C9.1 C8.1 87.81,20.91 84.05,17.14 83.57,16.67 79.44,16.67 79.28,16.67 78.65,16.03 77.85,15.24 R3_OC.4 | U$14.9 67.85,2.22 78.01,2.22
REL_DC_CTRL1
  Top 0.406: U$14.6 68.49,9.21 68.49,6.83 69.6,5.71 70.23,5.08 R36.2
REL_DC_GND  (via drill 0.38 pad 0.99)
  other vias: 75,11.27 90.71,2.86 78.65,21.27 73.57,21.27 79.44,9.05 85.63,22.54 69.92,3.65 82.46,4.13 82.46,13.65
  pour Top (isolate 0.305): 65.95,26.04 65.95,0 93.25,0 arc-90 97.38,5.56 98.11,5.56 98.11,20.48 97.54,20.48 arc-90 93.25,26.04
  pour Bottom (isolate 0.305): 65.95,26.04 65.95,0 93.25,0 arc-90 97.38,5.56 98.11,5.56 98.11,20.48 97.54,20.48 arc-90 93.25,26.04
REL_DC_INP1
  Top 0.305: RINP4.1 70.03,20.37 R40.1 70.03,20.75 U$14.3
REL_DC_INP2
  Top 0.305: RINP5.1 77.38,21 R41.1 77.22,21.38 77.22,22.07 76.74,22.54 69.28,22.54 U$14.2
REL_DC_INP3
  Top 0.305: RINP6.1 80.19,20.37 R42.1 | U$14.1 67.53,23.5 74.84,23.5 78.97,23.5 80.08,22.23 80.19,22.11 R42.1 | 80.08,21.38 R42.1
REL_DC_LED2
  Top 0.305: U$14.5 69.76,10.48 R38.2
REL_DC_LED3
  Top 0.305: U$14.4 R39.2
SENSOR_1
  Top 0.305: R7.1 SENSOR1.1 U$6.3
SENSOR_2
  Top 0.305: SENSOR2.1 R8.1
  Bottom 0.305: SENSOR2.1 55.72,32.7 56.99,31.43 58.9,31.43 U$6.2
SENSOR_3
  Top 0.305: SENSOR3.1 R9.1
  Bottom 0.305: U$6.1 60.17,28.26 58.9,29.53 58.9,30.16 58.26,30.8 56.52,30.8 55.88,31.43 54.61,31.43 53.34,32.7 SENSOR3.1
SENSOR_4
  Top 0.305: R49.1 SENSOR9.1 U$25.3
SENSOR_5
  Top 0.305: SENSOR10.1 R50.1
  Bottom 0.305: SENSOR10.1 67.94,32.7 69.22,31.43 71.12,31.43 U$25.2
SENSOR_6
  Top 0.305: SENSOR11.1 R51.1
  Bottom 0.305: U$25.1 72.39,28.26 71.12,29.53 71.12,30.16 70.48,30.8 68.74,30.8 68.1,31.43 66.83,31.43 65.56,32.7 SENSOR11.1
SENSOR_7
  Top 0.305: R55.1 SENSOR12.1 U$26.3
SENSOR_8
  Top 0.305: SENSOR13.1 R56.1
  Bottom 0.305: SENSOR13.1 80.17,32.7 81.44,31.43 83.34,31.43 U$26.2
SENSOR_9
  Top 0.305: SENSOR14.1 R57.1
  Bottom 0.305: U$26.1 84.61,28.26 83.34,29.53 83.34,30.16 82.71,30.8 80.96,30.8 80.33,31.43 79.06,31.43 77.79,32.7 SENSOR14.1
SENSOR_+3V1  (via drill 0.38 pad 0.99)
  Top 0.305: U$25.8 72.39,46.2 71.12,47.47 71.12,48.26 70.64,48.74 63.98,48.74 63.5,48.26 63.5,39.69 63.5,38.89 63.98,38.42 64.06,38.34 | 64.06,38.34 64.11,38.28 SJ13.2 | SJ9.2 SJ11.2 SJ13.2 | SJ13.2 65.54,38.28 | 64.06,38.34 63.5,37.78 63.5,27.46 63.82,27.15 v66.04,27.15
  Bottom 0.305: v66.04,27.15 SJ15.2
SENSOR_+3V2  (via drill 0.38 pad 0.99)
  Top 0.305: U$26.8 84.61,46.2 83.34,47.47 83.34,48.26 82.87,48.74 76.2,48.74 75.72,48.26 75.72,39.69 75.72,38.89 76.2,38.42 76.28,38.34 | 76.28,38.34 76.33,38.28 SJ21.2 | SJ17.2 SJ19.2 SJ21.2 | SJ21.2 77.76,38.28 | 76.28,38.34 75.72,37.78 75.72,27.46 76.04,27.15 v78.26,27.15
  Bottom 0.305: v78.26,27.15 SJ23.2
SENSOR_+3V3  (via drill 0.38 pad 0.99)
  Top 0.305: U$6.8 60.17,46.2 58.9,47.47 58.9,48.26 58.42,48.74 51.75,48.74 51.28,48.26 51.28,39.69 51.28,38.89 51.75,38.42 51.83,38.34 | 51.83,38.34 51.89,38.28 SJ5.2 | SJ1.2 SJ3.2 SJ5.2 | SJ5.2 53.31,38.28 | 51.83,38.34 51.28,37.78 51.28,27.46 51.59,27.15 v53.82,27.15
  Bottom 0.305: v53.82,27.15 SJ7.2
SENSOR_+5V
  Bottom 0.305: U$6.9 59.37,48.74 51.75,48.74 51.28,48.26 51.28,39.05 51.28,38.89 51.75,38.42 51.89,38.28 SJ6.2 SJ4.2 SJ2.2
SENSOR_+5V1
  Bottom 0.305: U$25.9 71.6,48.74 63.98,48.74 63.5,48.26 63.5,39.05 63.5,38.89 63.98,38.42 64.11,38.28 SJ14.2 SJ12.2 SJ10.2
SENSOR_+5V2
  Bottom 0.305: U$26.9 83.82,48.74 76.2,48.74 75.72,48.26 75.72,39.05 75.72,38.89 76.2,38.42 76.33,38.28 SJ22.2 SJ20.2 SJ18.2
SENSOR_GND
  pour Bottom (isolate 0.305): 61.44,24.77 61.44,49.53 49.21,49.53 49.21,24.77
  pour Top (isolate 0.305): 61.44,24.77 61.44,49.53 49.21,49.53 49.21,24.77
SENSOR_GND1
  pour Bottom (isolate 0.305): 73.66,24.77 73.66,49.53 61.44,49.53 61.44,24.77
  pour Top (isolate 0.305): 73.66,24.77 73.66,49.53 61.44,49.53 61.44,24.77
SENSOR_GND2
  pour Bottom (isolate 0.305): 85.88,26.04 85.88,49.53 73.66,49.53 73.66,26.04
  pour Top (isolate 0.305): 85.88,26.04 85.88,49.53 73.66,49.53 73.66,26.04
SENSOR_LED1
  Top 0.305: R10.1 57.9,47.35 58.9,46.35 58.9,42.39 60.17,41.12 U$6.6
SENSOR_LED2
  Top 0.305: R11.1 55.36,47.35 56.36,46.35 56.36,42.23 56.99,41.59 58.26,41.59 58.9,40.96 58.9,39.85 60.17,38.58 U$6.5
SENSOR_LED3
  Top 0.305: R12.1 52.82,47.35 53.82,46.35 53.82,42.23 54.45,41.59 55.72,41.59 56.36,40.96 56.36,39.69 56.99,39.05 58.26,39.05 58.74,39.05 58.9,38.89 58.9,38.42 58.9,37.31 60.17,36.04 U$6.4
SENSOR_LED4
  Top 0.305: R53.1 67.58,47.35 68.58,46.35 68.58,42.23 69.22,41.59 70.48,41.59 71.12,40.96 71.12,39.85 72.39,38.58 U$25.5
SENSOR_LED5
  Top 0.305: R52.1 70.12,47.35 71.12,46.35 71.12,42.39 72.39,41.12 U$25.6
SENSOR_LED6
  Top 0.305: R54.1 65.04,47.35 66.04,46.35 66.04,42.23 66.67,41.59 67.94,41.59 68.58,40.96 68.58,39.69 69.22,39.05 70.48,39.05 70.96,39.05 71.12,38.89 71.12,38.42 71.12,37.31 72.39,36.04 U$25.4
SENSOR_LED7
  Top 0.305: R59.1 79.8,47.35 80.8,46.35 80.8,42.23 81.44,41.59 82.71,41.59 83.34,40.96 83.34,39.85 84.61,38.58 U$26.5
SENSOR_LED8
  Top 0.305: R58.1 82.34,47.35 83.34,46.35 83.34,42.39 84.61,41.12 U$26.6
SENSOR_LED9
  Top 0.305: R60.1 77.26,47.35 78.26,46.35 78.26,42.23 78.9,41.59 80.17,41.59 80.8,40.96 80.8,39.69 81.44,39.05 82.71,39.05 83.19,39.05 83.34,38.89 83.34,38.42 83.34,37.31 84.61,36.04 U$26.4
SENSOR_PULL  (via drill 0.38 pad 0.99)
  Top 0.305: R7.2 57.58,28.21 R7.2 | R9.2 R8.2 | R8.2 R7.2 | v56.36,27.15 55.88,27.62 55.13,28.37 R8.2
  Bottom 0.305: SJ8.1 v56.36,27.15 55.72,27.15 55.09,27.78 54.93,27.94 54.93,28.89 54.45,29.37 53.84,29.37 | 53.84,29.37 SJ7.1 53.84,29.37
SENSOR_PULL1  (via drill 0.38 pad 0.99)
  Top 0.305: R49.2 69.8,28.21 R49.2 | R51.2 R50.2 | R50.2 R49.2 | v68.58,27.15 68.1,27.62 67.36,28.37 R50.2
  Bottom 0.305: SJ16.1 v68.58,27.15 67.94,27.15 67.31,27.78 67.15,27.94 67.15,28.89 66.67,29.37 66.06,29.37 | 66.06,29.37 SJ15.1 66.06,29.37
SENSOR_PULL2  (via drill 0.38 pad 0.99)
  Top 0.305: R55.2 82.03,28.21 R55.2 | R57.2 R56.2 | R56.2 R55.2 | v80.8,27.15 80.33,27.62 79.58,28.37 R56.2
  Bottom 0.305: SJ24.1 v80.8,27.15 80.17,27.15 79.53,27.78 79.38,27.94 79.38,28.89 78.9,29.37 78.29,29.37 | 78.29,29.37 SJ23.1 78.29,29.37
VALVE_+3V1  (via drill 0.38 pad 0.99)
  Top 0.305: 37.83,33.5 R45.1 36.51,33.45 | 36.51,33.45 R46.1 | SENSOR6.2 40.32,27.62 35.88,27.62 35.24,28.26 R46.1 | R44.1 v34.92,44.93 R43.1 | R46.1 35.67,33.45 | v36.51,36.67 36.51,34.29 36.51,33.45
  Bottom 0.305: U$5.8 46.67,46.67 46.67,47.94 46.2,48.74 35.56,48.74 34.92,48.74 34.45,48.26 34.45,45.4 v34.92,44.93 34.45,44.45 34.45,39.53 34.92,39.05 36.2,39.05 36.51,38.42 v36.51,36.67
VALVE_+3V3  (via drill 0.38 pad 0.99)
  Top 0.305: 37.83,8.73 R3.1 36.51,8.68 | 36.51,8.68 R4.1 | SENSOR5.2 40.32,2.86 35.88,2.86 35.24,3.49 R4.1 | R5.1 v34.92,20.16 R6.1 | R4.1 35.67,8.68 | v36.51,11.91 36.51,9.53 36.51,8.68
  Bottom 0.305: U$2.8 46.67,21.91 46.67,23.18 46.2,23.97 35.56,23.97 34.92,23.97 34.45,23.5 34.45,20.64 v34.92,20.16 34.45,19.68 34.45,14.76 34.92,14.29 36.2,14.29 36.51,13.65 v36.51,11.91
VALVE_+5V
  Top 0.61: L9110.3 L9110.2 45.35,19.21 C1.1 C2.1 45.61,21.59 46.67,21.59 U$2.9
VALVE_+5V1
  Top 0.61: L3.3 L3.2 45.35,43.97 C12.1 C11.1 45.61,46.35 46.67,46.35 U$5.9
VALVE_CLOSED
  Top 0.305: VALVE.4 R3.2 | U$2.2 46.67,6.67 44.77,6.67 44.13,7.3 44.13,8.73 43.66,9.21 40.64,9.21 39.53,9.21 38.42,10.32 38.15,10.32 R3.2 | 37.83,10.64 R3.2
VALVE_CLOSED1
  Top 0.305: VALVE1.4 R45.2 | U$5.2 46.67,31.43 44.77,31.43 44.13,32.07 44.13,33.5 43.66,33.97 40.64,33.97 39.53,33.97 38.42,35.08 38.15,35.08 R45.2 | 37.83,35.4 R45.2
VALVE_CONTROL1  (via drill 0.38 pad 0.99)
  Top 0.305: 35.13,23.54 R6.2 35.35,23.97 39.69,23.97 40.32,23.34 40.32,22.07 39.37,21.11 v39.37,20.48
  Top 0.406: v39.37,20.48 L9110.6 | U$2.6 47.47,15.08 45.4,15.08 v44.45,16.03
  Bottom 0.406: v39.37,20.48 41.91,20.48 44.45,17.94 v44.45,16.03
VALVE_CONTROL2  (via drill 0.38 pad 0.99)
  Top 0.305: 34.97,16.78 R5.2 34.92,15.24 35.24,14.92 39.37,14.92 39.85,15.4 39.85,18.73 v39.37,19.21
  Top 0.406: v39.37,19.21 L9110.7 | U$2.5 46.67,14.29 v44.45,14.29
  Bottom 0.406: v39.37,19.21 42.07,19.21 43.5,17.78 43.5,15.24 v44.45,14.29
VALVE_CONTROL3  (via drill 0.38 pad 0.99)
  Top 0.305: 35.13,48.31 R43.2 35.35,48.74 39.69,48.74 40.32,48.1 40.32,46.83 39.37,45.88 v39.37,45.24
  Top 0.406: v39.37,45.24 L3.6 | U$5.6 47.47,39.85 45.4,39.85 v44.45,40.8
  Bottom 0.406: v39.37,45.24 41.91,45.24 44.45,42.7 v44.45,40.8
VALVE_CONTROL4  (via drill 0.38 pad 0.99)
  Top 0.305: 34.97,41.55 R44.2 34.92,40.01 35.24,39.69 39.37,39.69 39.85,40.16 39.85,43.5 v39.37,43.97
  Top 0.406: v39.37,43.97 L3.7 | U$5.5 46.67,39.05 v44.45,39.05
  Bottom 0.406: v39.37,43.97 42.07,43.97 43.5,42.55 43.5,40.01 v44.45,39.05
VALVE_GND  (via drill 0.38 pad 0.99)
  other vias: 39.05,22.7 37.47,16.51 41.43,2.54 39.85,4.45 43.81,22.86
  pour Top (isolate 0.305): 50.48,0 50.48,24.77 33.66,24.77 33.66,0
  pour Bottom (isolate 0.305): 50.48,0 50.48,24.77 33.66,24.77 33.66,0
VALVE_GND1  (via drill 0.38 pad 0.99)
  other vias: 39.05,47.47 37.47,41.27 41.43,27.3 39.85,29.21 43.81,47.62
  pour Top (isolate 0.305): 49.21,24.77 49.21,49.53 32.38,49.53 32.38,24.77
  pour Bottom (isolate 0.305): 49.21,24.77 49.21,49.53 32.38,49.53 32.38,24.77
VALVE_LED
  Bottom 0.305: U$2.4 VLV_LED.1
VALVE_LED1
  Bottom 0.305: U$5.4 VLV_LED1.1
VALVE_OPENED
  Top 0.305: R4.2 35.24,11.16 VALVE.5 36.83,14.29 38.73,14.29 39.05,13.65 39.05,11.75 39.05,10.64 39.85,9.84 40.96,9.84 44.13,9.84 44.77,9.21 46.67,9.21 U$2.3
VALVE_OPENED1
  Top 0.305: R46.2 35.24,35.92 VALVE1.5 36.83,39.05 38.73,39.05 39.05,38.42 39.05,36.51 39.05,35.4 39.85,34.61 40.96,34.61 44.13,34.61 44.77,33.97 46.67,33.97 U$5.3
VALVE_SENSOR1
  Top 0.305: U$5.1 SENSOR6.1 45.4,27.89 R48.1
VALVE_SENSOR3
  Top 0.305: U$2.1 SENSOR5.1 45.4,3.13 R1.1

## Text on the board
tPlace: NC | COM | A5-SCL | 5V | Valve 1.0 | 5V | 3 | 2 | 1 | 5V | 3 | 2 | 1 | 5V | 3 | 2 | 1 | 5V | U8 | 3V | 3V | 3V | 3V | 3V | LEDS | LEDS | LEDS | A4-SDA | GN | GN | + | GN | + | GN | + | GN | A3 | O1 | O1 | O1 | O1 | O1 | D3 | SENSOR | OPN | CLS | O2 | O2 | O2 | O2 | O2 | D5 | 3V | + | + | 3V | + | + | 3V | + | + | O3 | I1 | I2 | OPN | CLS | GN | O3 | + | O3 | + | O3 | + | O3 | D6 | CONTROL | + | AC Relay / 1.0 | INP1 | + | I1 | I1 | I1 | I1 | I1 | GN | LED3 | I2 | I2 | I2 | I2 | I2 | INP3 | + | 3V | INP2 | + | LED3 | + | I3 | I3 | I3 | I3 | I3 | 5V | INPUTS | 3 | 2 | 1 | INPUTS | 3 | 2 | 1 | INPUTS | 3 | 2 | 1 | I2C 1.0 | NO | COM | PULL DOWN | INPUT3 | INPUT2 | INPUT1 | 3V | PULL DOWN | + | + | + | 5V | Valve 1.0 | 5V | 5V | I3 | GN | 3V | 3V | 3V | 12V / INPUT | LED1 | I2 | INPUT1 | INPUT2 | INPUT3 | GN | GN | GN | NO | OUT2 | + | I1 | + | + | + | O1 | O1 | 5V | D6 | SENSOR | O3 | + | O2 | OPN | CLS | O2 | GN | D5 | LED3 | COM | TR1 | O2 | O3 | I1 | I2 | OPN | CLS | GN | O3 | D3 | + | + | + | OUT1 | CONTROL | + | O1 | + | I1 | I1 | EC2 | A3 | LED2 | NC | OUT3 | LED3 | GN | I2 | I2 | SWITCH3 | 3V | INP3 | + | PULL DOWN | Prot DC Input 1.0 | I3 | I3 | 5V | DC Relay 1.0 | PULL DOWN
tNames: + | + | + | + | + | +
bNames: Valve 1.0 | Sensor 1.0 | Sensor 1.0 | Sensor 1.0 | LEDS | LEDS | LEDS | 3 | 2 | 1 | 3 | 2 | 1 | 3 | 2 | 1 | 5V | 5V | 5V | INPUTS | INPUTS | INPUTS | 3 | 2 | 1 | 3 | 2 | 1 | 3 | 2 | 1 | 3V | GN | 3V | GN | 3V | GN | SENSOR / PULLS | SENSOR / PULLS | SENSOR / PULLS | Parking 1.0 | Valve 1.0
_tNames: R6 | C2 | D5 | R31 | C6 | R11 | R10 | R11 | R10 | R11 | R10 | R32 | L9110 | C1 | R5 | C3 | R18 | R19 | R2_OC1 | D4 | R20 | R21 | R33 | R4 | R3 | R8 | R7 | R8 | R7 | R8 | R7 | C7 | R2 | R1 | R35 | R34 | C8 | C9 | C5 | R40 | R41 | R42 | R6 | C2 | C4 | R24 | R23 | R22 | L9110 | C1 | R17 | U6 | R28 | D1 | D2 | D3 | R29 | R5 | L1 | R39 | OK1 | OK2 | OK3 | C3 | R16 | R38 | R15 | R37 | U$3 | R3_OC | U5 | L2 | R25 | R4 | R3 | R14 | U$13 | U2 | D6 | R27 | R26 | R36 | R2 | D7 | R30 | R1 | R13